# Altium PCB UF_Servo.PcbDoc (part 11 of 12)
Units mm, origin at the board's own origin, x right, y up, seen from the top; angles counter-clockwise.
Board outline 222.63 x 100.1 mm, 6 copper layers (L1, L2, L3, L4, L5, L6), stack 1.609 mm thick; 1138 components, 775 nets, 3720 pads, 1641 vias.
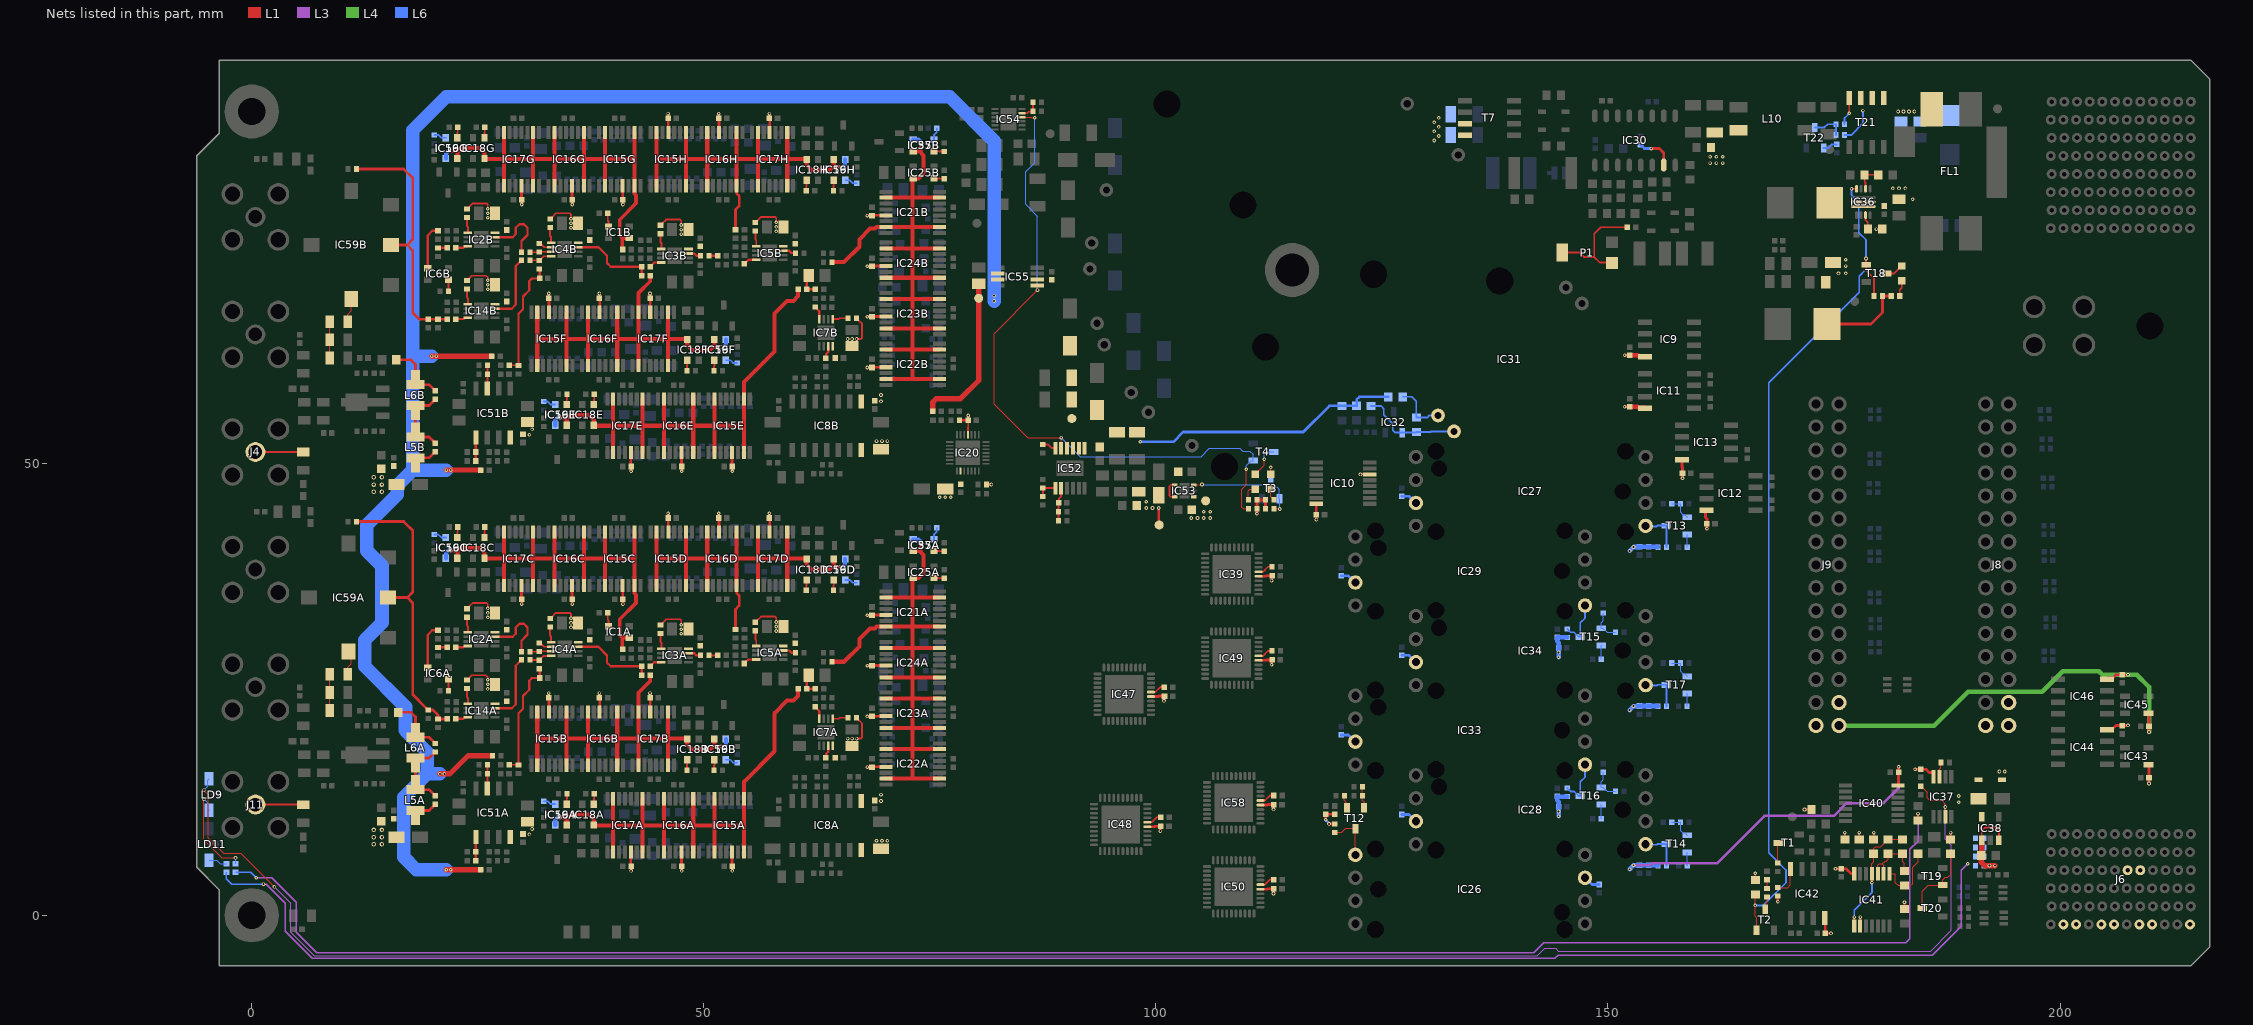
[diagram p12: the nets of this part, all layers, seen from the top]

## Via types
v1: diameter 0.4, hole 0.2, L1 to L6, tented both sides, 1545 vias
v2: diameter 0.4, hole 0.2, L1 to L6, 84 vias
v3: diameter 0.5, hole 0.25, L1 to L6, tented both sides, 12 vias

## Nets (pads, with @x,y where several pads share a name; then routed paths per layer and width w, separated by ;. In a path a pad name is that pad's centre, name@x,y a point inside that pad or via, vN(x,y) a via of type N, cw(c..) or ccw(c..) an arc to the next point about the centre after c; other vN are vias at no path point) (continued)
NetIC1A_1: IC1A.1 R6A.2 | length 1.5
  L1 w0.2: R6A.2@39.37,33.5 39.37,32.73 39.45,32.65 IC1A.1@39.45,32.035
NetIC1A_3: IC1A.3 IC15C.2 IC15C.7 IC15C.10 IC15C.15 IC16C.2 IC16C.7 IC16C.10 IC16C.15 IC17C.2 IC17C.7 IC17C.10 IC17C.15 IC18C.4 IC19C.4 IC56C.4 R7A.2 | length 67.5
  L1 w0.4: R7A.2@41.03,29.5 40.991,29.539 40.991,30.765 ; IC1A.3@41.75,30.765 40.991,30.765 ; IC15C.15@42.325,36.55 42.325,35.675 42.5,35.5 42.5,34.6 40.7,32.8 40.7,31.056 40.991,30.765
  L1 w0.45: v1(22,40.4) 22.57,40.4 22.735,40.235 ; IC19C.4@22.735,39.55 22.735,40.235 ; IC17C.10@27.875,36.55 27.875,39.5 ; IC17C.7@27.875,42.45 27.875,39.5 ; IC17C.15@31.125,36.55 31.125,39.5 ; IC17C.2@31.125,42.45 31.125,39.5 ; IC16C.10@33.475,36.55 33.475,39.5 ; IC16C.7@33.475,42.45 33.475,39.5 ; IC16C.15@36.725,36.55 36.725,39.5 ; IC16C.2@36.725,42.45 36.725,39.5 ; IC15C.10@39.075,36.55 39.075,39.5 ; IC15C.7@39.075,42.45 39.075,39.5 ; IC15C.15@42.325,36.55 42.325,39.5 ; IC15C.2@42.325,42.45 42.325,39.5 ; 22.735,40.235 23.2,40.7 25.2,40.7 25.735,40.165 IC18C.4@25.735,39.55 25.785,39.5 27.875,39.5 ; 27.875,39.5 31.125,39.5 ; 31.125,39.5 33.475,39.5 ; 33.475,39.5 36.725,39.5 ; 36.725,39.5 39.075,39.5 ; 39.075,39.5 42.325,39.5
  L6 w0.45: IC56C.4@21.465,39.55 21.465,40.136 21.729,40.4 v1(22,40.4)
NetIC1B_1: IC1B.1 R6B.2 | length 1.5
  L1 w0.2: R6B.2@39.37,77.7 39.37,76.93 39.45,76.85 IC1B.1@39.45,76.235
NetIC1B_3: IC1B.3 IC15G.2 IC15G.7 IC15G.10 IC15G.15 IC16G.2 IC16G.7 IC16G.10 IC16G.15 IC17G.2 IC17G.7 IC17G.10 IC17G.15 IC18G.4 IC19G.4 IC56G.4 R7B.2 | length 67.5
  L1 w0.4: R7B.2@41.03,73.7 40.991,73.739 40.991,74.965 ; IC1B.3@41.75,74.965 40.991,74.965 ; IC15G.15@42.325,80.75 42.325,79.875 42.5,79.7 42.5,78.8 40.7,77 40.7,75.256 40.991,74.965
  L1 w0.45: v1(22,84.6) 22.57,84.6 22.735,84.435 ; IC19G.4@22.735,83.75 22.735,84.435 ; IC17G.10@27.875,80.75 27.875,83.7 ; IC17G.7@27.875,86.65 27.875,83.7 ; IC17G.15@31.125,80.75 31.125,83.7 ; IC17G.2@31.125,86.65 31.125,83.7 ; IC16G.10@33.475,80.75 33.475,83.7 ; IC16G.7@33.475,86.65 33.475,83.7 ; IC16G.15@36.725,80.75 36.725,83.7 ; IC16G.2@36.725,86.65 36.725,83.7 ; IC15G.10@39.075,80.75 39.075,83.7 ; IC15G.7@39.075,86.65 39.075,83.7 ; IC15G.15@42.325,80.75 42.325,83.7 ; IC15G.2@42.325,86.65 42.325,83.7 ; 22.735,84.435 23.2,84.9 25.2,84.9 25.735,84.365 IC18G.4@25.735,83.75 25.785,83.7 27.875,83.7 ; 27.875,83.7 31.125,83.7 ; 31.125,83.7 33.475,83.7 ; 33.475,83.7 36.725,83.7 ; 36.725,83.7 39.075,83.7 ; 39.075,83.7 42.325,83.7
  L6 w0.45: IC56G.4@21.465,83.75 21.465,84.336 21.729,84.6 v1(22,84.6)
NetIC2A_1: IC2A.1 R14A.1 | length 1.7
  L1 w0.2: R14A.1@23.8,33.03 23.8,32.1 23.9,32 IC2A.1@23.9,31.35
NetIC2A_4: IC2A.4 R11A.2 | length 1.4
  L1 w0.25: R11A.2@22.57,29.7 23.425,29.7 23.575,29.85 IC2A.4@23.9,29.85
NetIC2A_7: IC2A.7 R30A.1 | length 7.8
  L1 w0.25: IC2A.7@26.9,30.85 28.85,30.85 29.2,31.2 29.2,31.9 29.6,32.3 30.1,32.3 30.5,31.9 30.5,31.1 29.83,30.43 R30A.1@29.83,29.2
NetIC2B_1: IC2B.1 R14B.1 | length 1.7
  L1 w0.2: R14B.1@23.8,77.23 23.8,76.3 23.9,76.2 IC2B.1@23.9,75.55
NetIC2B_4: IC2B.4 R11B.2 | length 1.4
  L1 w0.25: R11B.2@22.57,73.9 23.425,73.9 23.575,74.05 IC2B.4@23.9,74.05
NetIC2B_7: IC2B.7 R30B.1 | length 7.8
  L1 w0.25: IC2B.7@26.9,75.05 28.85,75.05 29.2,75.4 29.2,76.1 29.6,76.5 30.1,76.5 30.5,76.1 30.5,75.3 29.83,74.63 R30B.1@29.83,73.4
NetIC3A_1: IC3A.1 R46A.1 | length 1.7
  L1 w0.2: R46A.1@45.2,31.23 45.2,30.3 45.3,30.2 IC3A.1@45.3,29.55
NetIC3A_4: IC3A.4 R39A.2 | length 1.4
  L1 w0.25: R39A.2@44.07,27.6 44.07,27.62 44.5,28.05 IC3A.4@45.3,28.05
NetIC3A_7: IC3A.7 R33A.1 | length 1.4
  L1 w0.25: IC3A.7@48.3,29.05 48.95,29.05 49.2,28.8 R33A.1@49.63,28.8
NetIC3B_1: IC3B.1 R46B.1 | length 1.7
  L1 w0.2: R46B.1@45.2,75.43 45.2,74.5 45.3,74.4 IC3B.1@45.3,73.75
NetIC3B_4: IC3B.4 R39B.2 | length 1.4
  L1 w0.25: R39B.2@44.07,71.8 44.07,71.82 44.5,72.25 IC3B.4@45.3,72.25
NetIC3B_7: IC3B.7 R33B.1 | length 1.4
  L1 w0.25: IC3B.7@48.3,73.25 48.95,73.25 49.2,73 R33B.1@49.63,73
NetIC4A_1: IC4A.1 R49A.1 | length 1.7
  L1 w0.2: R49A.1@33,31.93 33,31 33.1,30.9 IC4A.1@33.1,30.25
NetIC4A_2: IC4A.2 R15A.2 | length 1.5
  L1 w0.2: R15A.2@31.8,30.17 31.99,29.98 32.107,29.98 32.337,29.75 IC4A.2@33.1,29.75
NetIC4A_3: IC4A.3 R15A.1 R30A.2 | length 2.4
  L1 w0.2: R30A.2@30.77,29.2 31.77,29.2 R15A.1@31.8,29.23 31.82,29.25 IC4A.3@33.1,29.25
NetIC4A_4: IC4A.4 R43A.2 R48A.2 | length 2.5
  L1 w0.2: R43A.2@30.77,28.3 31.77,28.3 R48A.2@31.8,28.27 ; R48A.2@31.82,28.27 32.3,28.75 IC4A.4@33.1,28.75
NetIC4A_7: IC4A.7 R39A.1 R56A.2 | length 9.4
  L1 w0.25: IC4A.7@36.1,29.75 38.35,29.75 39.3,28.8 39.3,28 39.7,27.6 R39A.1@43.13,27.6 R56A.2@43.13,26.6
NetIC4B_1: IC4B.1 R49B.1 | length 1.7
  L1 w0.2: R49B.1@33,76.13 33,75.2 33.1,75.1 IC4B.1@33.1,74.45
NetIC4B_2: IC4B.2 R15B.2 | length 1.5
  L1 w0.2: R15B.2@31.8,74.37 31.99,74.18 32.107,74.18 32.337,73.95 IC4B.2@33.1,73.95
NetIC4B_3: IC4B.3 R15B.1 R30B.2 | length 2.4
  L1 w0.2: R30B.2@30.77,73.4 31.77,73.4 R15B.1@31.8,73.43 31.82,73.45 IC4B.3@33.1,73.45
NetIC4B_4: IC4B.4 R43B.2 R48B.2 | length 2.5
  L1 w0.2: R43B.2@30.77,72.5 31.77,72.5 R48B.2@31.8,72.47 ; R48B.2@31.82,72.47 32.3,72.95 IC4B.4@33.1,72.95
NetIC4B_7: IC4B.7 R39B.1 R56B.2 | length 9.4
  L1 w0.25: IC4B.7@36.1,73.95 38.35,73.95 39.3,73 39.3,72.2 39.7,71.8 R39B.1@43.13,71.8 R56B.2@43.13,70.8
NetIC5A_1: IC5A.1 R50A.1 | length 1.7
  L1 w0.2: R50A.1@55.7,31.53 55.7,30.6 55.8,30.5 IC5A.1@55.8,29.85
NetIC5A_4: IC5A.4 R41A.2 | length 1.5
  L1 w0.25: R41A.2@54.47,27.9 54.47,27.92 54.635,28.085 54.655,28.085 54.885,28.315 54.903,28.315 54.938,28.35 IC5A.4@55.8,28.35
NetIC5A_7: IC5A.7 R40A.1 | length 1.4
  L1 w0.25: IC5A.7@58.8,29.35 59.45,29.35 59.7,29.1 R40A.1@60.13,29.1
NetIC5B_1: IC5B.1 R50B.1 | length 1.7
  L1 w0.2: R50B.1@55.7,75.73 55.7,74.8 55.8,74.7 IC5B.1@55.8,74.05
NetIC5B_4: IC5B.4 R41B.2 | length 1.5
  L1 w0.25: R41B.2@54.47,72.1 54.47,72.12 54.635,72.285 54.655,72.285 54.885,72.515 54.903,72.515 54.938,72.55 IC5B.4@55.8,72.55
NetIC5B_7: IC5B.7 R40B.1 | length 1.4
  L1 w0.25: IC5B.7@58.8,73.55 59.45,73.55 59.7,73.3 R40B.1@60.13,73.3
NetIC6A_1: IC6A.1 R32A.2 | length 1.3
  L1 w0.2: IC6A.1@21.75,26.165 21.77,26.145 R32A.2@21.77,24.9
NetIC6A_3: IC6A.3 R24A.1 | length 5
  L1 w0.25: IC6A.3@19.45,27.435 19.45,31.05 19.97,31.57 R24A.1@20.6,31.57
NetIC6B_1: IC6B.1 R32B.2 | length 1.3
  L1 w0.2: IC6B.1@21.75,70.365 21.77,70.345 R32B.2@21.77,69.1
NetIC6B_3: IC6B.3 R24B.1 | length 5
  L1 w0.25: IC6B.3@19.45,71.635 19.45,75.25 19.97,75.77 R24B.1@20.6,75.77
NetIC7A_1: IC7A.1 R54A.1 | length 1.7
  L1 w0.2: IC7A.1@64.25,21.8 64.9,21.8 65,21.9 R54A.1@65.93,21.9
NetIC7A_4: IC7A.4 R44A.2 | length 1.5
  L1 w0.25: R44A.2@62.3,23.13 62.32,23.13 62.485,22.965 62.485,22.945 62.715,22.715 62.715,22.697 62.75,22.662 IC7A.4@62.75,21.8
NetIC7A_7: IC7A.7 R42A.2 | length 1.4
  L1 w0.25: R42A.2@63.5,17.47 63.5,17.9 63.75,18.15 IC7A.7@63.75,18.8
NetIC7B_1: IC7B.1 R54B.1 | length 1.7
  L1 w0.2: IC7B.1@64.25,66 64.9,66 65,66.1 R54B.1@65.93,66.1
NetIC7B_4: IC7B.4 R44B.2 | length 1.5
  L1 w0.25: R44B.2@62.3,67.33 62.32,67.33 62.485,67.165 62.485,67.145 62.715,66.915 62.715,66.897 62.75,66.862 IC7B.4@62.75,66
NetIC7B_7: IC7B.7 R42B.2 | length 1.4
  L1 w0.25: R42B.2@63.5,61.67 63.5,62.1 63.75,62.35 IC7B.7@63.75,63
NetIC14A_1: IC14A.1 R59A.1 | length 1.7
  L1 w0.2: R59A.1@23.8,25.13 23.8,24.2 23.9,24.1 IC14A.1@23.9,23.45
NetIC14A_4: IC14A.4 R57A.2 | length 1.4
  L1 w0.25: R57A.2@22.57,21.8 23.425,21.8 23.575,21.95 IC14A.4@23.9,21.95
NetIC14A_7: IC14A.7 R43A.1 | length 7.7
  L1 w0.25: IC14A.7@26.9,22.95 28.75,22.95 29.2,23.4 29.2,27.67 29.62,28.09 29.64,28.09 29.83,28.28 R43A.1@29.83,28.3
NetIC14B_1: IC14B.1 R59B.1 | length 1.7
  L1 w0.2: R59B.1@23.8,69.33 23.8,68.4 23.9,68.3 IC14B.1@23.9,67.65
NetIC14B_4: IC14B.4 R57B.2 | length 1.4
  L1 w0.25: R57B.2@22.57,66 23.425,66 23.575,66.15 IC14B.4@23.9,66.15
NetIC14B_7: IC14B.7 R43B.1 | length 7.7
  L1 w0.25: IC14B.7@26.9,67.15 28.75,67.15 29.2,67.6 29.2,71.87 29.62,72.29 29.64,72.29 29.83,72.48 R43B.1@29.83,72.5
NetIC15A_2: IC15A.2 IC15A.7 IC15A.10 IC15A.15 IC16A.2 IC16A.7 IC16A.10 IC16A.15 IC17A.2 IC17A.7 IC17A.10 IC17A.15 IC18A.4 IC19A.4 IC56A.4 R31A.1 | length 73.8
  L1 w0.45: v1(34.1,10.9) 34.67,10.9 34.835,10.735 ; IC19A.4@34.835,10.05 34.835,10.735 ; IC17A.10@39.975,7.05 39.975,10 ; IC17A.7@39.975,12.95 39.975,10 ; IC17A.15@43.225,7.05 43.225,10 ; IC17A.2@43.225,12.95 43.225,10 ; IC16A.10@45.575,7.05 45.575,10 ; IC16A.7@45.575,12.95 45.575,10 ; IC16A.15@48.825,7.05 48.825,10 ; IC16A.2@48.825,12.95 48.825,10 ; IC15A.10@51.175,7.05 51.175,10 ; IC15A.7@51.175,12.95 51.175,10 ; IC15A.15@54.425,7.05 54.425,10 ; R31A.1@60.43,25.1 60.43,24.33 59.9,23.8 59.2,23.8 57.8,22.4 57.8,18.2 54.425,14.825 IC15A.2@54.425,12.95 54.425,10 ; 34.835,10.735 35.3,11.2 37.3,11.2 37.835,10.665 IC18A.4@37.835,10.05 37.885,10 39.975,10 ; 39.975,10 43.225,10 ; 43.225,10 45.575,10 ; 45.575,10 48.825,10 ; 48.825,10 51.175,10 ; 51.175,10 54.425,10
  L6 w0.45: IC56A.4@33.565,10.05 33.565,10.636 33.829,10.9 v1(34.1,10.9)
NetIC15B_2: IC15B.2 IC15B.7 IC15B.10 IC15B.15 IC16B.2 IC16B.7 IC16B.10 IC16B.15 IC17B.2 IC17B.7 IC17B.10 IC17B.15 IC18B.4 IC19B.4 IC56B.4 R56A.1 | length 63.3
  L1 w0.4: IC17B.15@42.775,22.55 42.775,24.675 44.07,25.97 R56A.1@44.07,26.6
  L1 w0.45: IC15B.2@31.575,16.65 31.575,19.6 ; IC15B.15@31.575,22.55 31.575,19.6 ; IC15B.7@34.825,16.65 34.825,19.6 ; IC15B.10@34.825,22.55 34.825,19.6 ; IC16B.2@37.175,16.65 37.175,19.6 ; IC16B.15@37.175,22.55 37.175,19.6 ; IC16B.7@40.425,16.65 40.425,19.6 ; IC16B.10@40.425,22.55 40.425,19.6 ; IC17B.2@42.775,16.65 42.775,19.6 ; IC17B.15@42.775,22.55 42.775,19.6 ; IC17B.7@46.025,16.65 46.025,19.6 ; IC17B.10@46.025,22.55 46.025,19.6 ; IC19B.4@51.165,19.55 51.165,18.865 ; v1(51.9,18.7) 51.33,18.7 51.165,18.865 ; 31.575,19.6 34.825,19.6 ; 34.825,19.6 37.175,19.6 ; 37.175,19.6 40.425,19.6 ; 40.425,19.6 42.775,19.6 ; 42.775,19.6 46.025,19.6 ; 46.025,19.6 48.115,19.6 IC18B.4@48.165,19.55 48.165,18.935 48.7,18.4 50.7,18.4 51.165,18.865
  L6 w0.45: v1(51.9,18.7) 52.171,18.7 52.435,18.964 IC56B.4@52.435,19.55
NetIC15D_2: IC15D.2 IC15D.7 IC15D.10 IC15D.15 IC16D.2 IC16D.7 IC16D.10 IC16D.15 IC17D.2 IC17D.7 IC17D.10 IC17D.15 IC18D.4 IC19D.4 IC56D.4 R8A.2 | length 63.9
  L1 w0.3: R8A.2@53.5,31.67 53.5,33.9 53.9,34.3 53.9,35.4 53.85,35.45 53.85,35.486 53.625,35.711 IC16D.7@53.625,36.55
  L1 w0.45: IC15D.2@44.775,36.55 44.775,39.5 ; IC15D.15@44.775,42.45 44.775,39.5 ; IC15D.7@48.025,36.55 48.025,39.5 ; IC15D.10@48.025,42.45 48.025,39.5 ; IC16D.2@50.375,36.55 50.375,39.5 ; IC16D.15@50.375,42.45 50.375,39.5 ; IC16D.7@53.625,36.55 53.625,39.5 ; IC16D.10@53.625,42.45 53.625,39.5 ; IC17D.2@55.975,36.55 55.975,39.5 ; IC17D.15@55.975,42.45 55.975,39.5 ; IC17D.7@59.225,36.55 59.225,39.5 ; IC17D.10@59.225,42.45 59.225,39.5 ; IC19D.4@64.365,39.45 64.365,38.765 ; v1(65.1,38.6) 64.53,38.6 64.365,38.765 ; 44.775,39.5 48.025,39.5 ; 48.025,39.5 50.375,39.5 ; 50.375,39.5 53.625,39.5 ; 53.625,39.5 55.975,39.5 ; 55.975,39.5 59.225,39.5 ; 59.225,39.5 61.315,39.5 IC18D.4@61.365,39.45 61.365,38.835 61.9,38.3 63.9,38.3 64.365,38.765
  L6 w0.45: v1(65.1,38.6) 65.371,38.6 65.635,38.864 IC56D.4@65.635,39.45
NetIC15E_2: IC15E.2 IC15E.7 IC15E.10 IC15E.15 IC16E.2 IC16E.7 IC16E.10 IC16E.15 IC17E.2 IC17E.7 IC17E.10 IC17E.15 IC18E.4 IC19E.4 IC56E.4 R31B.1 | length 73.8
  L1 w0.45: v1(34.1,55.1) 34.67,55.1 34.835,54.935 ; IC19E.4@34.835,54.25 34.835,54.935 ; IC17E.10@39.975,51.25 39.975,54.2 ; IC17E.7@39.975,57.15 39.975,54.2 ; IC17E.15@43.225,51.25 43.225,54.2 ; IC17E.2@43.225,57.15 43.225,54.2 ; IC16E.10@45.575,51.25 45.575,54.2 ; IC16E.7@45.575,57.15 45.575,54.2 ; IC16E.15@48.825,51.25 48.825,54.2 ; IC16E.2@48.825,57.15 48.825,54.2 ; IC15E.10@51.175,51.25 51.175,54.2 ; IC15E.7@51.175,57.15 51.175,54.2 ; IC15E.15@54.425,51.25 54.425,54.2 ; R31B.1@60.43,69.3 60.43,68.53 59.9,68 59.2,68 57.8,66.6 57.8,62.4 54.425,59.025 IC15E.2@54.425,57.15 54.425,54.2 ; 34.835,54.935 35.3,55.4 37.3,55.4 37.835,54.865 IC18E.4@37.835,54.25 37.885,54.2 39.975,54.2 ; 39.975,54.2 43.225,54.2 ; 43.225,54.2 45.575,54.2 ; 45.575,54.2 48.825,54.2 ; 48.825,54.2 51.175,54.2 ; 51.175,54.2 54.425,54.2
  L6 w0.45: IC56E.4@33.565,54.25 33.565,54.836 33.829,55.1 v1(34.1,55.1)
NetIC15F_2: IC15F.2 IC15F.7 IC15F.10 IC15F.15 IC16F.2 IC16F.7 IC16F.10 IC16F.15 IC17F.2 IC17F.7 IC17F.10 IC17F.15 IC18F.4 IC19F.4 IC56F.4 R56B.1 | length 63.3
  L1 w0.4: IC17F.15@42.775,66.75 42.775,68.875 44.07,70.17 R56B.1@44.07,70.8
  L1 w0.45: IC15F.2@31.575,60.85 31.575,63.8 ; IC15F.15@31.575,66.75 31.575,63.8 ; IC15F.7@34.825,60.85 34.825,63.8 ; IC15F.10@34.825,66.75 34.825,63.8 ; IC16F.2@37.175,60.85 37.175,63.8 ; IC16F.15@37.175,66.75 37.175,63.8 ; IC16F.7@40.425,60.85 40.425,63.8 ; IC16F.10@40.425,66.75 40.425,63.8 ; IC17F.2@42.775,60.85 42.775,63.8 ; IC17F.15@42.775,66.75 42.775,63.8 ; IC17F.7@46.025,60.85 46.025,63.8 ; IC17F.10@46.025,66.75 46.025,63.8 ; IC19F.4@51.165,63.75 51.165,63.065 ; v1(51.9,62.9) 51.33,62.9 51.165,63.065 ; 31.575,63.8 34.825,63.8 ; 34.825,63.8 37.175,63.8 ; 37.175,63.8 40.425,63.8 ; 40.425,63.8 42.775,63.8 ; 42.775,63.8 46.025,63.8 ; 46.025,63.8 48.115,63.8 IC18F.4@48.165,63.75 48.165,63.135 48.7,62.6 50.7,62.6 51.165,63.065
  L6 w0.45: v1(51.9,62.9) 52.171,62.9 52.435,63.164 IC56F.4@52.435,63.75
NetIC15H_2: IC15H.2 IC15H.7 IC15H.10 IC15H.15 IC16H.2 IC16H.7 IC16H.10 IC16H.15 IC17H.2 IC17H.7 IC17H.10 IC17H.15 IC18H.4 IC19H.4 IC56H.4 R8B.2 | length 63.9
  L1 w0.3: R8B.2@53.5,75.87 53.5,78.1 53.9,78.5 53.9,79.6 53.85,79.65 53.85,79.686 53.625,79.911 IC16H.7@53.625,80.75
  L1 w0.45: IC15H.2@44.775,80.75 44.775,83.7 ; IC15H.15@44.775,86.65 44.775,83.7 ; IC15H.7@48.025,80.75 48.025,83.7 ; IC15H.10@48.025,86.65 48.025,83.7 ; IC16H.2@50.375,80.75 50.375,83.7 ; IC16H.15@50.375,86.65 50.375,83.7 ; IC16H.7@53.625,80.75 53.625,83.7 ; IC16H.10@53.625,86.65 53.625,83.7 ; IC17H.2@55.975,80.75 55.975,83.7 ; IC17H.15@55.975,86.65 55.975,83.7 ; IC17H.7@59.225,80.75 59.225,83.7 ; IC17H.10@59.225,86.65 59.225,83.7 ; IC19H.4@64.365,83.65 64.365,82.965 ; v1(65.1,82.8) 64.53,82.8 64.365,82.965 ; 44.775,83.7 48.025,83.7 ; 48.025,83.7 50.375,83.7 ; 50.375,83.7 53.625,83.7 ; 53.625,83.7 55.975,83.7 ; 55.975,83.7 59.225,83.7 ; 59.225,83.7 61.315,83.7 IC18H.4@61.365,83.65 61.365,83.035 61.9,82.5 63.9,82.5 64.365,82.965
  L6 w0.45: v1(65.1,82.8) 65.371,82.8 65.635,83.064 IC56H.4@65.635,83.65
NetIC18A_1: IC18A.1 R60A.2 | length 1.2
  L1 w0.2: IC18A.1@37.835,12.35 37.835,12.935 37.87,12.97 R60A.2@37.87,13.5
NetIC18B_1: IC18B.1 R60B.2 | length 1.2
  L1 w0.2: R60B.2@48.13,16.1 48.13,16.63 48.165,16.665 IC18B.1@48.165,17.25
NetIC18C_1: IC18C.1 R60C.2 | length 1.2
  L1 w0.2: IC18C.1@25.735,41.85 25.735,42.435 25.77,42.47 R60C.2@25.77,43
NetIC18D_1: IC18D.1 R60D.2 | length 1.2
  L1 w0.2: R60D.2@61.33,36 61.33,36.53 61.365,36.565 IC18D.1@61.365,37.15
NetIC18E_1: IC18E.1 R60E.2 | length 1.2
  L1 w0.2: IC18E.1@37.835,56.55 37.835,57.135 37.87,57.17 R60E.2@37.87,57.7
NetIC18F_1: IC18F.1 R60F.2 | length 1.2
  L1 w0.2: R60F.2@48.13,60.3 48.13,60.83 48.165,60.865 IC18F.1@48.165,61.45
NetIC18G_1: IC18G.1 R60G.2 | length 1.2
  L1 w0.2: IC18G.1@25.735,86.05 25.735,86.635 25.77,86.67 R60G.2@25.77,87.2
NetIC18H_1: IC18H.1 R60H.2 | length 1.2
  L1 w0.2: R60H.2@61.33,80.2 61.33,80.73 61.365,80.765 IC18H.1@61.365,81.35
NetIC19A_1: IC19A.1 R61A.2 | length 1.2
  L1 w0.2: IC19A.1@34.835,12.35 34.835,12.935 34.87,12.97 R61A.2@34.87,13.5
NetIC19B_1: IC19B.1 R61B.2 | length 1.2
  L1 w0.2: R61B.2@51.13,16.1 51.13,16.63 51.165,16.665 IC19B.1@51.165,17.25
NetIC19C_1: IC19C.1 R61C.2 | length 1.2
  L1 w0.2: IC19C.1@22.735,41.85 22.735,42.435 22.77,42.47 R61C.2@22.77,43
NetIC19D_1: IC19D.1 R61D.2 | length 1.2
  L1 w0.2: R61D.2@64.33,36 64.33,36.53 64.365,36.565 IC19D.1@64.365,37.15
NetIC19E_1: IC19E.1 R61E.2 | length 1.2
  L1 w0.2: IC19E.1@34.835,56.55 34.835,57.135 34.87,57.17 R61E.2@34.87,57.7
NetIC19F_1: IC19F.1 R61F.2 | length 1.2
  L1 w0.2: R61F.2@51.13,60.3 51.13,60.83 51.165,60.865 IC19F.1@51.165,61.45
NetIC19G_1: IC19G.1 R61G.2 | length 1.2
  L1 w0.2: IC19G.1@22.735,86.05 22.735,86.635 22.77,86.67 R61G.2@22.77,87.2
NetIC19H_1: IC19H.1 R61H.2 | length 1.2
  L1 w0.2: R61H.2@64.33,80.2 64.33,80.73 64.365,80.765 IC19H.1@64.365,81.35
NetIC21A_2: IC21A.2 IC21A.7 IC21A.10 IC21A.15 IC22A.2 IC22A.7 IC22A.10 IC22A.15 IC23A.2 IC23A.7 IC23A.10 IC23A.15 IC24A.2 IC24A.7 IC24A.10 IC24A.15 IC25A.4 IC35A.4 IC57A.4 R10A.1 | length 84.2
  L1 w0.45: R10A.1@64.17,28.1 65.5,28.1 67.2,29.8 67.2,30.6 68.4,31.8 68.942,31.8 69.117,31.975 73.1,31.975 ; IC22A.15@70.15,15.175 73.1,15.175 ; IC22A.10@70.15,18.425 73.1,18.425 ; IC23A.15@70.15,20.775 73.1,20.775 ; IC23A.10@70.15,24.025 73.1,24.025 ; IC24A.15@70.15,26.375 73.1,26.375 ; IC24A.10@70.15,29.625 73.1,29.625 ; IC21A.10@70.15,35.225 73.1,35.225 ; IC35A.4@73.15,40.365 73.835,40.365 ; v1(74,41.1) 74,40.53 73.835,40.365 ; IC22A.2@76.05,15.175 73.1,15.175 ; IC22A.7@76.05,18.425 73.1,18.425 ; IC23A.2@76.05,20.775 73.1,20.775 ; IC23A.7@76.05,24.025 73.1,24.025 ; IC24A.2@76.05,26.375 73.1,26.375 ; IC24A.7@76.05,29.625 73.1,29.625 ; IC21A.2@76.05,31.975 73.1,31.975 ; IC21A.7@76.05,35.225 73.1,35.225 ; 73.1,15.175 73.1,18.425 ; 73.1,18.425 73.1,20.775 ; 73.1,20.775 73.1,24.025 ; 73.1,24.025 73.1,26.375 ; 73.1,26.375 73.1,29.625 ; 73.1,29.625 73.1,31.975 ; 73.1,31.975 73.1,35.225 ; 73.1,35.225 73.1,37.315 IC25A.4@73.15,37.365 73.765,37.365 74.3,37.9 74.3,39.9 73.835,40.365
  L6 w0.45: IC57A.4@73.15,41.635 73.736,41.635 74,41.371 v1(74,41.1)
NetIC21B_2: IC21B.2 IC21B.7 IC21B.10 IC21B.15 IC22B.2 IC22B.7 IC22B.10 IC22B.15 IC23B.2 IC23B.7 IC23B.10 IC23B.15 IC24B.2 IC24B.7 IC24B.10 IC24B.15 IC25B.4 IC35B.4 IC57B.4 R10B.1 | length 84.2
  L1 w0.45: R10B.1@64.17,72.3 65.5,72.3 67.2,74 67.2,74.8 68.4,76 68.942,76 69.117,76.175 73.1,76.175 ; IC22B.15@70.15,59.375 73.1,59.375 ; IC22B.10@70.15,62.625 73.1,62.625 ; IC23B.15@70.15,64.975 73.1,64.975 ; IC23B.10@70.15,68.225 73.1,68.225 ; IC24B.15@70.15,70.575 73.1,70.575 ; IC24B.10@70.15,73.825 73.1,73.825 ; IC21B.10@70.15,79.425 73.1,79.425 ; IC35B.4@73.15,84.565 73.835,84.565 ; v1(74,85.3) 74,84.73 73.835,84.565 ; IC22B.2@76.05,59.375 73.1,59.375 ; IC22B.7@76.05,62.625 73.1,62.625 ; IC23B.2@76.05,64.975 73.1,64.975 ; IC23B.7@76.05,68.225 73.1,68.225 ; IC24B.2@76.05,70.575 73.1,70.575 ; IC24B.7@76.05,73.825 73.1,73.825 ; IC21B.2@76.05,76.175 73.1,76.175 ; IC21B.7@76.05,79.425 73.1,79.425 ; 73.1,59.375 73.1,62.625 ; 73.1,62.625 73.1,64.975 ; 73.1,64.975 73.1,68.225 ; 73.1,68.225 73.1,70.575 ; 73.1,70.575 73.1,73.825 ; 73.1,73.825 73.1,76.175 ; 73.1,76.175 73.1,79.425 ; 73.1,79.425 73.1,81.515 IC25B.4@73.15,81.565 73.765,81.565 74.3,82.1 74.3,84.1 73.835,84.565
  L6 w0.45: IC57B.4@73.15,85.835 73.736,85.835 74,85.571 v1(74,85.3)
NetIC25A_1: IC25A.1 R63A.2 | length 1.2
  L1 w0.2: IC25A.1@75.45,37.365 76.035,37.365 76.07,37.33 R63A.2@76.6,37.33
NetIC25B_1: IC25B.1 R63B.2 | length 1.2
  L1 w0.2: IC25B.1@75.45,81.565 76.035,81.565 76.07,81.53 R63B.2@76.6,81.53
NetIC26_1: IC26.1 R79.1 T12.3 | length 5.4
  L1 w0.125: R79.1@119.776,9.224 120.562,9.224 120.994,9.656 122.064,9.656 T12.3@122.076,9.644 122.062,9.63 IC26.1@122.062,6.741
NetIC27_1: IC27.1 R80.1 T13.3 | length 4.8
  L6 w0.2: IC27.1@154.162,43.121 154.227,43.056 155.394,43.056 155.494,43.156 156.444,43.156 T13.3@156.464,43.136 R80.1@156.464,40.756
NetIC28_1: IC28.1 R87.1 T14.3 | length 4.8
  L6 w0.2: IC28.1@154.162,7.921 154.227,7.856 155.394,7.856 155.494,7.956 T14.3@156.444,7.956 156.464,7.936 R87.1@156.464,5.556
NetIC29_1: IC29.1 R88.1 T15.3 | length 5.5
  L6 w0.2: R88.1@145.494,31.726 145.514,31.726 145.741,31.498 145.741,31.478 145.864,31.356 146.244,31.356 146.744,30.856 T15.3@146.944,30.856 146.944,32.406 147.462,32.924 IC29.1@147.462,34.321
NetIC30_7: IC30.7 R102.2 | length 4.3
  L1 w0.3: v1(154.794,84.856) 155.694,84.856 156.169,84.381 IC30.7@156.169,83.031
  L6 w0.3: R102.2@153.594,85.286 153.614,85.286 153.754,85.146 153.754,85.126 154.024,84.856 v1(154.794,84.856)
NetIC31_1: IC31.1 R114.1 R115.2 | length 6
  L6 w0.2: R114.1@127.3,57.4 128.3,57.4 128.8,56.9 R115.2@128.8,55.1 130,55.1 130.244,55.344 IC31.1@131.207,55.344
NetIC31_2: IC31.2 IC32.1 R115.1 R117.2 | length 11.3
  L6 w0.2: R117.2@123.8,56.4 124.9,56.4 125.2,56.1 125.2,55.4 126.2,54.4 126.2,53.7 126.45,53.45 IC32.1@127.25,53.45 128.75,53.45 R115.1@128.8,53.5 130.4,53.5 130.476,53.576 IC31.2@132.974,53.576
NetIC33_1: IC33.1 R95.1 T16.3 | length 5.5
  L6 w0.2: R95.1@145.494,14.126 145.514,14.126 145.741,13.898 145.741,13.878 145.864,13.756 146.244,13.756 146.744,13.256 T16.3@146.944,13.256 146.944,14.806 147.462,15.324 IC33.1@147.462,16.721
NetIC34_1: IC34.1 R96.1 T17.3 | length 4.8
  L6 w0.2: IC34.1@154.162,25.521 154.227,25.456 155.394,25.456 155.494,25.556 156.444,25.556 T17.3@156.464,25.536 R96.1@156.464,23.156
NetIC35A_1: IC35A.1 R64A.2 | length 1.2
  L1 w0.2: IC35A.1@75.45,40.365 76.035,40.365 76.07,40.33 R64A.2@76.6,40.33
NetIC35B_1: IC35B.1 R64B.2 | length 1.2
  L1 w0.2: IC35B.1@75.45,84.565 76.035,84.565 76.07,84.53 R64B.2@76.6,84.53
NetIC36_2: IC36.2 L1.1
NetIC36_5: IC36.5 R127.1 R129.2 | length 3.1
  L1 w0.2: IC36.5@178.494,80.406 178.494,81.056 178.394,81.156 R127.1@178.394,81.956 R129.2@179.894,81.956
NetIC36_10: IC36.10 R128.2 | length 1.7
  L1 w0.2: IC36.10@178.494,77.506 178.494,76.956 178.744,76.706 R128.2@178.744,75.956
NetIC37_3: IC37.3 LD9.1 R135.1 | length 227.7
  L1 w0.1: v1(-5.3,13.9) -4.8,13.4 -4.8,8.6 -3.1,6.9 -1.2,6.9 v1(2.5,3.2)
  L1 w0.125: R135.1@184.594,14.326 184.821,14.098 184.851,14.098 185.294,13.656 185.294,13.056 185.594,12.756 186.894,12.756 187.319,12.331 v1(187.319,12.031) IC37.3@187.319,10.956
  L3 w0.1: v1(2.5,3.2) 4.3,1.4 4.3,-1.8 6.9,-4.4 142.2,-4.4 143,-3.6 144.2,-3.6 144.5,-3.9 185.694,-3.9 187.994,-1.6 187.994,7.796 187.319,8.471 v1(187.319,12.031)
  L6 w0.1: v1(-5.3,13.9) -4.88,14.32 -4.88,15.002 LD9.1@-4.721,15.161
NetIC37_7: IC37.7 R137.2 | length 1.7
  L1 w0.125: IC37.7@186.669,15.356 186.669,16.231 186.824,16.386 R137.2@186.824,16.956
NetIC39_36: IC39.36 R122.2 | length 1.7
  L1 w0.2: IC39.36@111.35,38.05 111.85,38.05 112.4,38.6 R122.2@112.83,38.6
NetIC41_1: IC41.1 IC41.11 R37.1 R160.1 R166.1 | length 13.1
  L1 w0.125: IC41.11@179.194,4.656 179.194,5.756 179.394,5.956 R160.1@179.394,6.856 179.394,7.456 179.594,7.656 180.194,7.656 180.556,8.018 180.556,8.068 180.944,8.456 R166.1@180.994,8.456 R37.1@182.594,8.456
  L1 w0.2: IC41.1@177.244,-1.144 v1(177.244,-0.144) ; v1(179.194,3.656) IC41.11@179.194,4.656
  L6 w0.2: v1(177.244,-0.144) 177.244,0.606 179.194,2.556 v1(179.194,3.656)
NetIC41_8: IC41.8 R179.1 R183.1 | length 7.2
  L1 w0.125: IC41.8@181.144,4.656 181.694,4.656 181.794,4.556 181.794,3.656 182.094,3.356 R179.1@182.794,3.356 183.494,3.356 183.694,3.556 183.694,5.356 184.294,5.956 R183.1@184.294,6.856
NetIC41_9: IC41.9 IC41.10 R37.2 R166.2 R179.2 | length 7.7
  L1 w0.125: IC41.10@179.844,4.656 179.844,5.606 179.994,5.756 180.344,5.756 ; IC41.9@180.494,4.656 180.494,5.606 180.344,5.756 ; R179.2@182.794,4.956 182.794,5.756 182.594,5.956 R37.2@182.594,6.856 R166.2@180.994,6.856 180.994,6.256 180.794,6.056 180.644,6.056 180.344,5.756
NetIC42_4: IC42.4 R181.2 | length 3.2
  L1 w0.125: R181.2@168.794,3.126 169.864,3.126 170.189,3.451 IC42.4@170.189,5.156
NetIC47_36: IC47.36 R125.2 | length 1.7
  L1 w0.2: IC47.36@99.45,24.75 99.95,24.75 100.5,25.3 R125.2@100.93,25.3
NetIC48_36: IC48.36 R123.2 | length 1.7
  L1 w0.2: IC48.36@99.05,10.35 99.55,10.35 100.1,10.9 R123.2@100.53,10.9
NetIC49_36: IC49.36 R124.2 | length 1.7
  L1 w0.2: IC49.36@111.35,28.75 111.85,28.75 112.4,29.3 R124.2@112.83,29.3
NetIC50_36: IC50.36 R116.2 | length 1.7
  L1 w0.2: IC50.36@111.55,3.45 112.05,3.45 112.6,4 R116.2@113.03,4
NetIC51A_3: IC51A.3 R73A.2 R74A.2 | length 2.6
  L1 w0.25: IC51A.3@26.065,14.1 26.065,16.695 R73A.2@26.07,16.7
NetIC51A_5: IC51A.5 R68A.2 R69A.2 | length 2.6
  L1 w0.25: R68A.2@24.77,6.1 24.77,8.675 IC51A.5@24.795,8.7
NetIC51B_3: IC51B.3 R73B.2 R74B.2 | length 2.6
  L1 w0.25: IC51B.3@26.065,58.3 26.065,60.895 R73B.2@26.07,60.9
NetIC51B_5: IC51B.5 R68B.2 R69B.2 | length 2.6
  L1 w0.25: R68B.2@24.77,50.3 24.77,52.875 IC51B.5@24.795,52.9
NetIC54_5: IC54.5 R202.1 R203.1 | length 2.3
  L1 w0.2: IC54.5@85.2,88.775 85.775,88.775 85.937,88.937 86.347,88.937 R203.1@86.41,89 R202.1@86.41,90
NetIC56A_1: IC56A.1 R207A.2 | length 1.4
  L6 w0.2: R207A.2@32.3,12.67 32.73,12.67 33.05,12.35 IC56A.1@33.565,12.35
NetIC56B_1: IC56B.1 R207B.2 | length 1.4
  L6 w0.2: IC56B.1@52.435,17.25 52.95,17.25 53.27,16.93 R207B.2@53.7,16.93
NetIC56C_1: IC56C.1 R207C.2 | length 1.4
  L6 w0.2: R207C.2@20.2,42.17 20.63,42.17 20.95,41.85 IC56C.1@21.465,41.85
NetIC56D_1: IC56D.1 R207D.2 | length 1.4
  L6 w0.2: IC56D.1@65.635,37.15 66.15,37.15 66.47,36.83 R207D.2@66.9,36.83
NetIC56E_1: IC56E.1 R207E.2 | length 1.4
  L6 w0.2: R207E.2@32.3,56.87 32.73,56.87 33.05,56.55 IC56E.1@33.565,56.55
NetIC56F_1: IC56F.1 R207F.2 | length 1.4
  L6 w0.2: IC56F.1@52.435,61.45 52.95,61.45 53.27,61.13 R207F.2@53.7,61.13
NetIC56G_1: IC56G.1 R207G.2 | length 1.4
  L6 w0.2: R207G.2@20.2,86.37 20.63,86.37 20.95,86.05 IC56G.1@21.465,86.05
NetIC56H_1: IC56H.1 R207H.2 | length 1.4
  L6 w0.2: IC56H.1@65.635,81.35 66.15,81.35 66.47,81.03 R207H.2@66.9,81.03
NetIC57A_1: IC57A.1 R209A.2 | length 1.4
  L6 w0.2: IC57A.1@75.45,41.635 75.45,42.15 75.77,42.47 R209A.2@75.77,42.9
NetIC57B_1: IC57B.1 R209B.2 | length 1.4
  L6 w0.2: IC57B.1@75.45,85.835 75.45,86.35 75.77,86.67 R209B.2@75.77,87.1
NetIC58_36: IC58.36 R211.2 | length 1.7
  L1 w0.2: IC58.36@111.55,12.75 112.05,12.75 112.6,13.3 R211.2@113.03,13.3
NetIC59A_2: IC59A.2 R219A.2 | length 2.7
  L1 w0.132: R219A.2@10.6,26.7 10.6,27.5 11,27.9 IC59A.2@11,29.23
NetIC59B_2: IC59B.2 R219B.2 | length 2.7
  L1 w0.132: R219B.2@10.6,65.7 10.6,66.5 11,66.9 IC59B.2@11,68.23
NetL2A_1: L2A.1 R18A.1 R31A.2 | length 2.6
  L1 w0.25: L2A.1@61.6,26.6 61.37,26.37 R31A.2@61.37,25.1 R18A.1@62.33,25.1
NetL2B_1: L2B.1 R18B.1 R31B.2 | length 2.6
  L1 w0.25: L2B.1@61.6,70.8 61.37,70.57 R31B.2@61.37,69.3 R18B.1@62.33,69.3
NetL5A_1: L5A.1 L6A.2 R214A.1 R215A.2 | length 6.5
  L1 w0.3: L5A.1@18.1,13.95 19.62,13.95 20.14,13.43 20.14,13.41 20.28,13.27 R214A.1@20.3,13.27 ; L5A.1@18.1,14.95 L6A.2@18.1,16.45 ; L6A.2@18.1,17.45 19.62,17.45 20.14,17.97 20.14,17.99 20.28,18.13 R215A.2@20.3,18.13
NetL5B_1: L5B.1 L6B.2 R214B.1 R215B.2 | length 6.5
  L1 w0.3: L5B.1@18.1,52.95 19.62,52.95 20.14,52.43 20.14,52.41 20.28,52.27 R214B.1@20.3,52.27 ; L5B.1@18.1,53.95 L6B.2@18.1,55.45 ; L6B.2@18.1,56.45 19.62,56.45 20.14,56.97 20.14,56.99 20.28,57.13 R215B.2@20.3,57.13
NetL6A_1: L6A.1 L7A.2 R215A.1 | length 6.1
  L1 w0.3: L7A.2@16,22.5 17.6,22.5 18.1,22 L6A.1@18.1,20.75 ; L6A.1@18.1,19.75 19.62,19.75 20.14,19.23 20.14,19.21 20.28,19.07 R215A.1@20.3,19.07
NetL6B_1: L6B.1 L7B.2 R215B.1 | length 6.1
  L1 w0.3: L7B.2@16,61.5 17.6,61.5 18.1,61 L6B.1@18.1,59.75 ; L6B.1@18.1,58.75 19.62,58.75 20.14,58.23 20.14,58.21 20.28,58.07 R215B.1@20.3,58.07
NetLD1_1: LD1.1 T3.3 | length 1.9
  L1 w0.1: LD1.1@112.7,48.825 v1(112.7,49.6)
  L6 w0.1: T3.3@112.7,48.45 v1(112.7,49.6)
NetLD1_2: LD1.2 R142.1 | length 1.3
  L1 w0.1: LD1.2@112.7,47.175 112.7,46.37 112.81,46.26 112.83,46.26 113.07,46.02 R142.1@113.07,46
NetLD2_1: LD2.1 T4.3 | length 3.8
  L1 w0.1: LD2.1@111,48.825 112,49.825 v1(112,50.5)
  L6 w0.1: v1(112,50.5) 112,51.1 112.2,51.3 T4.3@113.05,51.3
NetLD2_2: LD2.2 R194.1 | length 1.9
  L1 w0.1: R194.1@110.23,46 110.23,47.03 110.375,47.175 LD2.2@111,47.175
NetLD9_2: LD9.2 R132.1 | length 11
  L1 w0.1: v1(-5.3,12.922) -5.3,8.4 -3.3,6.4 v1(-1.8,6.4)
  L6 w0.1: v1(-5.3,12.922) -4.88,12.502 -4.88,11.82 LD9.2@-4.721,11.661 ; R132.1@-1.8,5.77 v1(-1.8,6.4)
NetLD10_1: LD10.1 T18.3 | length 2
  L1 w0.2: T18.3@180.844,71.056 181.669,71.056 LD10.1@182.494,71.881
NetLD10_2: LD10.2 R139.1 | length 1.8
  L1 w0.2: R139.1@182.264,68.556 182.264,69.226 182.494,69.456 LD10.2@182.494,70.231
NetLD11_2: LD11.2 R141.1 | length 2.1
  L6 w0.1: LD11.2@-4.721,6.149 -3.85,6.149 -3.471,5.77 R141.1@-2.8,5.77
NetP1_2: P1.2 P1.3 R108.1 | length 12.5
  L1 w0.2: P1.2@144.944,73.356 146.894,73.356 147.394,72.856 148.494,72.856 ; P1.3@150.444,72.206 150.394,72.256 149.094,72.256 148.494,72.856 ; R108.1@152.124,76.156 149.194,76.156 148.494,75.456 148.494,72.856
NetR11A_1: R11A.1 R12A.2 | length 1
  L1 w0.25: R12A.2@20.6,29.67 20.63,29.7 R11A.1@21.63,29.7
NetR11B_1: R11B.1 R12B.2 | length 1
  L1 w0.25: R12B.2@20.6,73.87 20.63,73.9 R11B.1@21.63,73.9
NetR33A_2: R33A.2 R34A.1 | length 1
  L1 w0.25: R33A.2@50.57,28.8 R34A.1@51.53,28.8
NetR33B_2: R33B.2 R34B.1 | length 1
  L1 w0.25: R33B.2@50.57,73 R34B.1@51.53,73
NetR81_1: R81.1 R83.2 T12.1 | length 2.4
  L1 w0.125: R81.1@122.846,14.294 122.846,12.804 123.026,12.624 T12.1@123.026,11.944
NetR82_1: R82.1 R86.2 T13.1 | length 2.8
  L6 w0.125: R86.2@157.064,45.556 R82.1@158.024,45.556 158.024,44.626 158.281,44.368 158.481,44.368 T13.1@158.744,44.106
NetR84_2: R84.2 T12.2 | length 1.5
  L1 w0.125: R84.2@120.846,13.294 120.846,12.804 121.066,12.583 121.066,12.003 T12.2@121.126,11.944
NetR85_2: R85.2 T13.2 | length 1.5
  L6 w0.125: T13.2@158.744,42.206 158.744,40.776 R85.2@158.764,40.756
NetR89_1: R89.1 R92.2 T14.1 | length 2.8
  L6 w0.125: R92.2@157.064,10.356 R89.1@158.024,10.356 158.024,9.426 158.281,9.168 158.481,9.168 T14.1@158.744,8.906
NetR90_1: R90.1 R94.2 T15.1 | length 3.5
  L6 w0.125: R90.1@149.494,33.486 149.494,32.656 149.244,32.406 T15.1@149.244,31.806 149.444,31.806 149.894,31.356 R94.2@150.824,31.356
NetR91_2: R91.2 T14.2 | length 1.5
  L6 w0.125: T14.2@158.744,7.006 158.744,5.576 R91.2@158.764,5.556
NetR93_2: R93.2 T15.2 | length 1.6
  L6 w0.125: T15.2@149.244,29.906 149.264,29.886 R93.2@149.264,28.356
NetR97_1: R97.1 R119.2 T16.1 | length 3.5
  L6 w0.125: R97.1@149.494,15.886 149.494,15.056 149.244,14.806 T16.1@149.244,14.206 149.444,14.206 149.894,13.756 R119.2@150.824,13.756
NetR98_1: R98.1 R121.2 T17.1 | length 2.8
  L6 w0.125: R121.2@157.064,27.956 R98.1@158.024,27.956 158.024,27.026 158.281,26.768 158.481,26.768 T17.1@158.744,26.506
NetR99_2: R99.2 T16.2 | length 1.6
  L6 w0.125: T16.2@149.244,12.306 149.264,12.286 R99.2@149.264,10.756
NetR120_2: R120.2 T17.2 | length 1.5
  L6 w0.125: T17.2@158.744,24.606 R120.2@158.744,23.176 R120.2@158.764,23.156
NetR153_1: R153.1 R154.2 | length 1
  L1 w0.125: R154.2@167.594,3.026 R153.1@167.594,3.986
NetR154_1: R154.1 T2.3 | length 1.5
  L1 w0.125: T2.3@167.394,0.706 167.394,1.356 167.594,1.556 R154.1@167.594,2.086
NetR182_1: R182.1 T1.3 | length 2.3
  L1 w0.125: R182.1@168.794,5.826 168.794,8.006 T1.3@168.844,8.056
NetR184_1: R184.1 T19.1 T20.3 | length 8.4
  L1 w0.125: T20.3@184.744,0.856 184.744,2.706 185.444,3.406 T19.1@187.044,3.406 187.044,4.006 187.294,4.256 187.594,4.256 187.894,4.556 R184.1@187.894,6.856
NetR191_2: R191.2 R192.1 T22.3 | length 3.7
  L6 w0.2: T22.3@172.894,87.206 173.944,87.206 174.294,87.556 R192.1@175.224,87.556 R191.2@175.224,86.356
NetR192_2: R192.2 T21.4 | length 3.1
  L1 w0.2: T21.4@176.689,90.456 176.694,90.451 v1(176.694,88.756)
  L6 w0.2: R192.2@176.164,87.556 176.164,88.226 v1(176.694,88.756)
NetR193_1: R193.1 T22.1 | length 1.6
  L6 w0.2: T22.1@173.844,84.906 174.344,84.906 174.764,85.326 R193.1@175.294,85.326
NetR218A_2: R218A.2 R219A.1 R221A.2 | length 4
  L1 w0.132: R218A.2@8.6,22.7 R219A.1@8.6,26.7
NetR218B_2: R218B.2 R219B.1 R221B.2 | length 4
  L1 w0.132: R218B.2@8.6,61.7 R219B.1@8.6,65.7
P2V5_REF: B4.1 C214.2 IC55.6 IC55.7 R36A.1 R36B.1 R70A.1 R70B.1 R77.1 | length 224.7
  L1 w0.58: v1(19.9,61.9) v1(20.4,61.9) R70B.1@26.53,61.9 ; v1(20.8,15.7) v1(21.3,15.7) 21.9,15.7 23.9,17.7 R70A.1@26.63,17.7 ; v1(21.5,5.1) v1(22,5.1) R36A.1@25.33,5.1 ; v1(21.5,49.3) v1(22,49.3) R36B.1@25.33,49.3 ; R77.1@75.33,55.8 75.33,56.83 75.7,57.2 78.4,57.2 80.4,59.2 B4.1@80.4,68.3 C214.2@80.4,69.9
  L6 w1.5: v1(19.9,61.9) 17.8,61.9 ; v1(20.8,15.7) 19.4,15.7 ; v1(21.5,5.1) 18.2,5.1 16.8,6.5 16.8,13.1 19.4,15.7 ; v1(21.5,49.3) 17.8,49.3 ; v1(82.1,68) 82.1,85.7 77.2,90.6 21.5,90.6 17.8,86.9 17.8,61.9 ; 17.8,49.3 17.8,61.9 ; 17.8,49.3 16.1,47.6 16.1,46.6 12.7,43.2 12.7,40.4 14.4,38.7 14.4,32.4 12.5,30.5 12.5,27.6 17,23.1 17,20.5 19.4,18.1 19.4,15.7
  other v1: 82.1,68.6
P3V3: C56.2 C57.2 C59.2 C60.2 C121.2 C125.2 C126.2 C129.2 C133.2 C134.2 C147.2 C150.2 C151.2 C152.2 C153.2 C162.2 C163.1 C298.2 IC9.4 IC11.8 IC12.8 IC13.8 IC26.6 IC40.14 L9.2 R80.2 R87.2 R88.2 R95.2 R96.2 R139.2 R140.2 | length 74.2
  L1 w0.3: v1(151.844,56.306) C57.2@152.394,56.306 ; v1(151.844,62.006) C56.2@152.394,62.006 ; IC13.8@158.194,50.451 158.194,49.656 158.244,49.606 C60.2@158.244,48.956 v1(158.244,48.406) ; IC12.8@160.894,44.851 160.794,44.751 160.794,44.056 160.944,43.906 C59.2@160.944,43.356 v1(160.944,42.806) ; L9.2@174.219,65.456 179.094,65.456 180.364,66.726 R140.2@180.364,68.556 R139.2@181.324,68.556 ; IC40.14@182.094,14.406 182.144,14.456 C298.2@182.144,15.856 v1(182.144,16.48)
  L1 w0.5: C57.2@152.394,56.306 153.276,56.306 153.381,56.201 154.044,56.201 IC11.8@154.094,56.151 ; C56.2@152.394,62.006 153.276,62.006 153.381,61.901 154.044,61.901 IC9.4@154.094,61.851
  L3 w0.3: v1(152.828,5.59) 154.69,5.59 154.9,5.8 162.038,5.8 167.294,11.056 174.994,11.056 176.394,12.456 180.494,12.456 182.144,14.106 v1(182.144,16.48)
  L6 w0.3: IC26.6@147.491,4.201 148.236,3.456 C121.2@149.03,3.456
  L6 w0.5: v1(144.544,11.006) C150.2@144.544,12.056 144.544,12.606 144.394,12.756 C151.2@144.394,13.206 144.414,13.186 R95.2@145.494,13.186 ; v1(144.544,28.606) C134.2@144.544,29.656 144.544,30.206 144.394,30.356 C147.2@144.394,30.806 144.414,30.786 R88.2@145.494,30.786 ; v1(152.394,5.156) v1(152.828,5.59) 153.478,5.59 C129.2@153.494,5.606 C133.2@154.494,5.606 155.484,5.606 155.524,5.566 R87.2@155.524,5.556 ; v1(152.394,22.756) v1(152.828,23.19) 153.478,23.19 C152.2@153.494,23.206 C153.2@154.494,23.206 155.484,23.206 155.524,23.166 R96.2@155.524,23.156 ; v1(152.394,40.356) v1(152.828,40.79) 153.478,40.79 C125.2@153.494,40.806 C126.2@154.494,40.806 155.484,40.806 155.524,40.766 R80.2@155.524,40.756
  other v1: 144.544,11.531 144.544,29.131 175.494,71.056 176.294,71.056 176.294,71.856 176.294,72.556
P3V3_DIOT: C1.2 C174.1 C180.2 D22.2 IC38.5 IC41.2 IC41.14 IC42.8 R155.2 R160.2 R165.1 R178.1 R180.1 R181.1 R184.2 R185.1 | length 11.5
  L1 w0.2: R155.2@166.294,3.956 v1(166.294,4.706) ; v1(171.744,11.756) R185.1@172.494,11.756 ; R165.1@176.194,8.456 v1(176.194,9.206) ; R178.1@177.794,8.456 v1(177.794,9.206) ; IC41.2@177.894,-1.144 v1(177.894,-0.144) ; R160.2@179.394,8.456 v1(179.394,9.206) ; R180.1@182.794,0.756 v1(182.794,1.506) ; R184.2@187.894,8.456 v1(187.894,9.206)
  L1 w0.3: v1(168.794,1.561) R181.1@168.794,2.186 ; IC42.8@173.999,-0.244 174.044,-0.289 C180.2@174.044,-1.944 v1(174.668,-1.944) ; v1(175.169,5.206) 176.344,5.206 176.894,4.656 IC41.14@177.244,4.656
  other v1: 188.794,12.556 188.794,13.256
P3V3_ISO: B2.1 C58.2 C122.2 C123.2 C124.2 C127.2 C128.2 C148.2 C149.2 C184.2 C185.2 C186.2 C187.2 C188.2 C194.2 C205.2 C215.2 IC10.6 IC10.16 IC20.18 IC27.6 IC28.6 IC29.6 IC33.6 IC34.6 IC39.35 IC47.35 IC48.35 IC49.35 IC50.35 IC53.1 IC58.35 R75.2 R76.2 R79.2 R142.2 R194.2 R195.2 R196.2 | length 34.2
  L1 w0.2: IC20.18@79.2,53.2 79.2,54 79.25,54.05 C194.2@79.25,54.8 ; v1(122.625,48.825) IC10.6@123.65,48.825
  L1 w0.254: R76.2@78.27,54.8 C194.2@79.25,54.8
  L1 w0.3: C194.2@79.25,54.8 v1(79.25,55.33) ; R75.2@81.27,47.7 v1(81.8,47.7) ; IC48.35@99.05,9.85 99.85,9.85 99.9,9.9 100.5,9.9 v1(100.5,9.37) ; IC47.35@99.45,24.25 100.25,24.25 100.3,24.3 100.9,24.3 v1(100.9,23.77) ; v1(111.17,44.47) R196.2@111.17,45 R194.2@111.17,46 R142.2@112.13,46 R195.2@112.13,45 ; IC49.35@111.35,28.25 112.15,28.25 112.2,28.3 112.8,28.3 v1(112.8,27.77) ; IC39.35@111.35,37.55 112.15,37.55 112.2,37.6 112.8,37.6 v1(112.8,37.07) ; IC50.35@111.55,2.95 112.35,2.95 112.4,3 113,3 v1(113,2.47) ; IC58.35@111.55,12.25 112.35,12.25 112.4,12.3 113,12.3 v1(113,11.77) ; v1(117.75,43.82) C58.2@117.75,44.35 IC10.16@117.75,45.575 ; v1(118.776,10.619) C123.2@118.776,11.244 C122.2@119.776,11.244 ; v1(119.151,10.164) R79.2@119.776,10.164
  L6 w0.3: v1(118.776,10.619) 119.132,10.263 119.132,10.183 v1(119.151,10.164) ; C148.2@120.494,20.006 121.287,20.006 122.032,19.261 IC33.6@122.062,19.261 ; C128.2@120.494,37.606 121.287,37.606 122.032,36.861 IC29.6@122.062,36.861 ; C127.2@127.194,11.206 127.987,11.206 128.732,10.461 IC28.6@128.762,10.461 ; C149.2@127.194,28.806 127.987,28.806 128.732,28.061 IC34.6@128.762,28.061 ; C124.2@127.194,46.406 127.987,46.406 128.732,45.661 IC27.6@128.762,45.661
  other v1: 103.9,44 104.6,44 105.3,44 106,44 105.3,44.7 106,44.7
P3V3_ISO_PG: IC53.3 R195.1 T3.1 | length 12.5
  L1 w0.1: IC53.3@104.2,47.65 104.75,47.65 104.8,47.7 v1(105.1,47.7) ; R195.1@113.07,45 v1(113.7,45)
  L6 w0.1: v1(105.1,47.7) 112.1,47.7 112.4,47.4 113.4,47.4 113.65,47.15 T3.1@113.65,46.15 113.7,46.1 v1(113.7,45)
P3V3_MP: C169.2 C219.2 C306.2 D22.1 IC37.8 IC43.4 IC44.8 J8.30 R132.2 R134.2 | length 213.7
  L1 w0.2: R134.2@184.294,10.556 v1(184.294,11.306)
  L1 w0.3: v1(183.969,16.206) C169.2@184.594,16.206 185.169,16.206 185.519,15.855 185.944,15.855 186.019,15.78 IC37.8@186.019,15.356 ; IC44.8@205.194,20.561 205.344,20.711 205.849,20.711 206.194,21.056 v1(207.518,21.056) ; IC43.4@209.794,16.706 209.844,16.656 C306.2@209.844,15.256 v1(209.844,14.631)
  L3 w0.15: v1(0.5,4.2) 2.2,4.2 4.9,1.5 4.9,-1.8 7.2,-4.1 141.8,-4.1 142.9,-3 182.938,-3 183.394,-2.544 183.394,7.356 184.294,8.256 v1(184.294,11.306)
  L6 w0.15: R132.2@-1.8,4.83 -0.13,4.83 v1(0.5,4.2)
  other v1: 193.294,15.956 193.894,15.956
P3V3_MP2: C220.2 C307.2 IC45.4 IC46.8 J9.30 | length 47.1
  L1 w0.3: IC46.8@205.194,26.161 205.344,26.311 205.849,26.311 206.194,26.656 C220.2@206.894,26.656 v1(207.518,26.656) ; IC45.4@209.794,22.406 209.844,22.356 C307.2@209.844,20.956 v1(209.844,20.331)
  L4 w0.5: J9.30@175.55,21.043 186.081,21.043 189.822,24.784 198.022,24.784 200.294,27.056 204.294,27.056 204.694,26.656 v1(207.518,26.656) 208.494,26.656 209.844,25.306 v1(209.844,20.331)
P5V0: B1.1 C4A.2 C4B.2 C5A.2 C5B.2 C8A.2 C8B.2 C9A.2 C9B.2 C11A.2 C11B.2 C12A.2 C12B.2 C13A.2 C13B.2 C14A.2 C14B.2 C15A.2 C15B.2 C16A.2 C16B.2 C17A.2 C17B.2 C18A.2 C18B.2 C24A.2 C24B.2 C25A.2 C25B.2 C45A.2 C45B.2 C45C.2 C45D.2 C45E.2 C45F.2 C45G.2 C45H.2 C62A.2 C62B.2 C62C.2 C62D.2 C62E.2 C62F.2 C62G.2 C62H.2 C76A.2 C76B.2 C76C.2 C76D.2 C76E.2 C76F.2 C76G.2 C76H.2 C89A.2 C89B.2 C103A.2 C103B.2 C115A.2 C115B.2 C177A.2 C177B.2 C189A.2 C189B.2 C190A.2 C190B.2 C193.2 C195.1 C199.1 C202.2 C217A.1 C217B.1 C218A.2 C218B.2 C221A.1 C221B.1 IC2A.8 IC2B.8 IC3A.8 IC3B.8 IC4A.8 IC4B.8 IC5A.8 IC5B.8 IC7A.8 IC7B.8 IC8A.1 IC8A.14 IC8B.1 IC8B.14 IC14A.8 IC14B.8 IC15A.13 IC15B.13 IC15C.13 IC15D.13 IC15E.13 IC15F.13 IC15G.13 IC15H.13 IC16A.13 IC16B.13 IC16C.13 IC16D.13 IC16E.13 IC16F.13 IC16G.13 IC16H.13 IC17A.13 IC17B.13 IC17C.13 IC17D.13 IC17E.13 IC17F.13 IC17G.13 IC17H.13 IC20.2 IC21A.13 IC21B.13 IC22A.13 IC22B.13 IC23A.13 IC23B.13 IC24A.13 IC24B.13 IC51A.8 IC51B.8 L3.2 L5A.2 L5B.2 R14A.2 R14B.2 R46A.2 R46B.2 R49A.2 R49B.2 R50A.2 R50B.2 R54A.2 R54B.2 R59A.2 R59B.2 R214A.2 R214B.2 | length 110.6
  L1 w0.2: R59A.2@23.8,26.07 23.82,26.07 24.01,26.26 24.01,26.28 24.33,26.6 25.9,26.6 26.096,26.404 26.096,26.104 v1(26.1,26.1) ; R14A.2@23.8,33.97 23.82,33.97 24.01,34.16 24.01,34.18 24.43,34.6 25.983,34.6 26.1,34.483 v1(26.1,34) ; R59B.2@23.8,70.27 23.82,70.27 24.01,70.46 24.01,70.48 24.33,70.8 25.9,70.8 26.096,70.604 26.096,70.304 v1(26.1,70.3) ; R14B.2@23.8,78.17 23.82,78.17 24.01,78.36 24.01,78.38 24.43,78.8 25.983,78.8 26.1,78.683 v1(26.1,78.2) ; R49A.2@33,32.87 33.02,32.87 33.21,33.06 33.21,33.08 33.63,33.5 35.183,33.5 35.3,33.383 v1(35.3,32.9) ; R49B.2@33,77.07 33.02,77.07 33.21,77.26 33.21,77.28 33.63,77.7 35.183,77.7 35.3,77.583 v1(35.3,77.1) ; R46A.2@45.2,32.17 45.22,32.17 45.41,32.36 45.41,32.38 45.83,32.8 47.383,32.8 47.5,32.683 v1(47.5,32.2) ; R46B.2@45.2,76.37 45.22,76.37 45.41,76.56 45.41,76.58 45.83,77 47.383,77 47.5,76.883 v1(47.5,76.4) ; R50A.2@55.7,32.47 55.72,32.47 55.91,32.66 55.91,32.68 56.33,33.1 57.883,33.1 58,32.983 v1(58,32.5) ; R50B.2@55.7,76.67 55.72,76.67 55.91,76.86 55.91,76.88 56.33,77.3 57.883,77.3 58,77.183 v1(58,76.7) ; R54A.2@66.87,21.9 66.87,21.88 67.06,21.69 67.08,21.69 67.5,21.27 67.5,19.717 67.383,19.6 v1(66.9,19.6) ; R54B.2@66.87,66.1 66.87,66.08 67.06,65.89 67.08,65.89 67.5,65.47 67.5,63.917 67.383,63.8 v1(66.9,63.8)
  L1 w0.25: v1(100.325,45.1) 100.325,43.262 B1.1@100.362,43.225
  L1 w0.3: L5A.2@18.1,11.65 19.62,11.65 20.14,12.17 20.14,12.19 20.28,12.33 R214A.2@20.3,12.33 ; L5B.2@18.1,50.65 19.62,50.65 20.14,51.17 20.14,51.19 20.28,51.33 R214B.2@20.3,51.33 ; IC17C.13@29.825,36.55 29.825,35.025 C76C.2@29.85,35 v1(29.85,34.47) ; IC17G.13@29.825,80.75 29.825,79.225 C76G.2@29.85,79.2 v1(29.85,78.67) ; v1(32.85,24.63) C45B.2@32.85,24.1 32.875,24.075 IC15B.13@32.875,22.55 ; v1(32.85,68.83) C45F.2@32.85,68.3 32.875,68.275 IC15F.13@32.875,66.75 ; IC16C.13@35.425,36.55 35.425,35.025 C62C.2@35.45,35 v1(35.45,34.47) ; IC16G.13@35.425,80.75 35.425,79.225 C62G.2@35.45,79.2 v1(35.45,78.67) ; v1(38.45,24.63) C62B.2@38.45,24.1 38.475,24.075 IC16B.13@38.475,22.55 ; v1(38.45,68.83) C62F.2@38.45,68.3 38.475,68.275 IC16F.13@38.475,66.75 ; IC15C.13@41.025,36.55 41.025,35.025 C45C.2@41.05,35 v1(41.05,34.47) ; IC15G.13@41.025,80.75 41.025,79.225 C45G.2@41.05,79.2 v1(41.05,78.67) ; IC17A.13@41.925,7.05 41.925,5.525 C76A.2@41.95,5.5 v1(41.95,4.97) ; IC17E.13@41.925,51.25 41.925,49.725 C76E.2@41.95,49.7 v1(41.95,49.17) ; v1(44.05,24.63) C76B.2@44.05,24.1 44.075,24.075 IC17B.13@44.075,22.55 ; v1(44.05,68.83) C76F.2@44.05,68.3 44.075,68.275 IC17F.13@44.075,66.75 ; v1(46.05,44.53) C45D.2@46.05,44 46.075,43.975 IC15D.13@46.075,42.45 ; v1(46.05,88.73) C45H.2@46.05,88.2 46.075,88.175 IC15H.13@46.075,86.65 ; IC16A.13@47.525,7.05 47.525,5.525 C62A.2@47.55,5.5 v1(47.55,4.97) ; IC16E.13@47.525,51.25 47.525,49.725 C62E.2@47.55,49.7 v1(47.55,49.17) ; v1(51.65,44.53) C62D.2@51.65,44 51.675,43.975 IC16D.13@51.675,42.45 ; v1(51.65,88.73) C62H.2@51.65,88.2 51.675,88.175 IC16H.13@51.675,86.65 ; IC15A.13@53.125,7.05 53.125,5.525 C45A.2@53.15,5.5 v1(53.15,4.97) ; IC15E.13@53.125,51.25 53.125,49.725 C45E.2@53.15,49.7 v1(53.15,49.17) ; v1(57.25,44.53) C76D.2@57.25,44 57.275,43.975 IC17D.13@57.275,42.45 ; v1(57.25,88.73) C76H.2@57.25,88.2 57.275,88.175 IC17H.13@57.275,86.65 ; v1(68.07,16.45) C103A.2@68.6,16.45 68.625,16.475 IC22A.13@70.15,16.475 ; v1(68.07,22.05) C115A.2@68.6,22.05 68.625,22.075 IC23A.13@70.15,22.075 ; v1(68.07,27.65) C177A.2@68.6,27.65 68.625,27.675 IC24A.13@70.15,27.675 ; v1(68.07,33.25) C89A.2@68.6,33.25 68.625,33.275 IC21A.13@70.15,33.275 ; v1(68.07,60.65) C103B.2@68.6,60.65 68.625,60.675 IC22B.13@70.15,60.675 ; v1(68.07,66.25) C115B.2@68.6,66.25 68.625,66.275 IC23B.13@70.15,66.275 ; v1(68.07,71.85) C177B.2@68.6,71.85 68.625,71.875 IC24B.13@70.15,71.875 ; v1(68.07,77.45) C89B.2@68.6,77.45 68.625,77.475 IC21B.13@70.15,77.475
  other v1: 69.1,8.3 69.7,8.3 70.3,8.3 30.7,9 31,9.6 69.6,12.7 69.6,13.4 65.9,19.6 66.4,19.6 26.1,25.1 26.1,25.6 47.5,31.2 58,31.5 47.5,31.7 35.3,31.9 58,32 35.3,32.4 26.1,33 26.1,33.5 98.925,45.1 99.625,45.1 98.925,45.8 76.1,46.3 76.7,46.3 77.3,46.3 69.1,52.5 69.7,52.5 70.3,52.5 30.7,53.2 31,53.8 69.6,56.9 69.6,57.6 65.9,63.8 66.4,63.8 26.1,69.3 26.1,69.8 47.5,75.4 58,75.7 47.5,75.9 35.3,76.1 58,76.2 35.3,76.6 26.1,77.2 26.1,77.7
  other v3: 13.5,7.9 14.4,7.9 13.5,8.7 14.4,8.7 13.5,9.5 14.4,9.5 13.5,46.9 14.4,46.9 13.5,47.7 14.4,47.7 13.5,48.5 14.4,48.5
P5V0_ILIM: IC52.6 R200.2 | length 1.6
  L1 w0.2: R200.2@87.5,52.14 88.06,52.14 88.467,51.733 88.842,51.733 IC52.6@88.875,51.7
P5V0_PG: IC52.5 IC54.4 IC55.1 R196.1 T4.1 | length 76.7
  L1 w0.125: IC54.4@85.2,88.325 86.2,88.325 86.25,88.275 v1(86.6,88.275) ; IC55.1@86.9,69.725 v1(86.9,69.2) 82.1,64.4 82.1,56.6 85.813,52.888 v1(89.525,52.888) IC52.5@89.525,51.7 ; v1(110,49.4) 110,47.7 109.5,47.2 109.5,45.2 109.7,45 R196.1@110.23,45
  L6 w0.125: v1(86.6,88.275) 86.6,83.3 85.6,82.3 85.6,78.7 86.9,77.4 v1(86.9,69.2) ; v1(89.525,52.888) 91.613,50.8 105,50.8 105.9,51.7 109.3,51.7 109.6,51.4 110.4,51.4 110.75,51.05 T4.1@110.75,50.35 110.55,50.35 110,49.8 v1(110,49.4)
P5V0_PGFB: IC52.7 R197.1 R201.2 | length 2.3
  L1 w0.2: R197.1@87.5,46.37 R201.2@87.5,47.33 87.53,47.3 IC52.7@88.875,47.3
P5V0_SET: C203.2 IC52.8 R198.2 R199.2 | length 3.7
  L1 w0.2: R198.2@89.23,43.7 R199.2@89.23,44.7 89.23,45.68 C203.2@89.25,45.7 89.293,45.743 89.293,46.193 89.517,46.417 89.517,47.292 IC52.8@89.525,47.3
P6V0: B12.1 C73.1 C74.1 C146.2 C196.2 C197.2 C198.2 C204.2 C213.2 D2.1 D3.1 IC52.1 IC52.2 IC52.3 IC52.4 IC53.4 IC53.6 IC55.2 R114.2 R126.2 | length 32.2
  L1 w0.2: IC53.6@102.1,46.35 101.65,46.35 101.5,46.5 101.5,47.5 101.65,47.65 IC53.4@102.1,47.65
  L6 w0.3: v1(98.262,52.425) 101.925,52.425 103,53.5 116.3,53.5 119.2,56.4 R126.2@120.6,56.4 C146.2@122.2,56.4 122.2,57.1 122.5,57.4 R114.2@125.7,57.4
P12V0_DIOT: C173.2 IC38.1 IC38.3 J6.A1 J6.D1 J6.E1 J6.G1 J6.H1 J6.J1 J6.K1 R257.1 R260.1 R261.1 R262.1 | length 8.4
  L1 w0.2: IC38.1@191.344,8.356 191.344,9.406 191.694,9.756 192.894,9.756 193.244,9.406 IC38.3@193.244,8.356
  L1 w0.6: IC38.1@191.344,8.356 191.344,6.706 C173.2@191.294,6.656 191.294,5.907 191.645,5.556 v1(192.194,5.556) v1(192.794,5.556)
P12V0_EEM: C164.2 C165.2 C170.2 C171.2 D21.1 FL1.2 IC36.1 J8.28 J8.29 J9.28 J9.29 R128.1 R141.2 R191.1 R257.2 R260.2 R261.2 R262.2 T21.1 T21.2 T21.3 | length 211.4
  L1 w0.2: v1(179.694,75.956) R128.1@180.344,75.956
  L3 w0.15: v1(1.3,3.5) 1.6,3.5 3.7,1.4 3.7,-1.7 6.7,-4.7 144.138,-4.7 144.494,-4.344 185.894,-4.344 189.094,-1.144 189.094,5.056 v1(189.794,5.756)
  L6 w0.15: R141.2@-2.8,4.83 -2.8,4.1 -2.2,3.5 v1(1.3,3.5)
  L6 w0.2: R191.1@176.164,86.356 176.894,86.356 178.194,87.656 v1(178.194,89.056)
  other v1: 183.694,79.256 181.494,80.456 182.194,80.456 182.894,80.456 182.094,88.956 182.694,88.956 183.294,88.956 183.894,88.956
P12V0_LLC: C130.1 C131.1 C168.2 L10.4 R101.2 T7.7 T7.8
  other v1: 161.294,83.256 161.994,83.256 162.694,83.256 161.294,83.956 161.994,83.956 162.694,83.956 130.794,85.756 131.294,86.256 130.794,86.756 131.294,87.256 130.794,87.756 131.294,88.256
PE_CLK.CLK_N: J6.F4
PE_CLK.CLK_P: J6.E4
PGOOD: IC36.7 R140.1 R155.1 T2.1 T18.1 | length 96.2
  L1 w0.125: R155.1@166.294,2.356 v1(166.294,1.156) 166.294,-0.044 166.444,-0.194 T2.1@166.444,-1.594
  L1 w0.2: v1(176.944,80.406) IC36.7@177.494,80.406 ; v1(178.544,72.706) T18.1@178.544,72.006 178.544,71.406 179.424,70.526 R140.1@179.424,68.556
  L6 w0.2: v1(166.294,1.156) 167.194,1.156 169.694,3.656 169.694,5.056 167.794,6.956 167.794,58.956 177.794,68.956 177.794,70.756 178.544,71.506 v1(178.544,72.706) 178.544,74.756 177.744,75.556 177.744,78.906 176.944,79.706 v1(176.944,80.406)
PHASE_DET_OUTA: IC59A.3 R57A.1 R58A.2 R213A.2 R225A.2 | length 32.2
  L1 w0.3: R225A.2@11.57,43.6 16.8,43.6 17.8,42.6 17.8,35.8 17.2,35.2 ; IC59A.3@15.38,35.2 17.2,35.2 ; R58A.2@20.6,21.77 20.6,22.2 20.03,22.77 19.48,22.77 19.34,22.91 19.34,22.93 17.8,24.47 17.8,34.6 17.2,35.2 ; R58A.2@20.68,21.77 R57A.1@21.6,21.77
PHASE_DET_OUTB: IC59B.3 R57B.1 R58B.2 R213B.2 R225B.2 | length 28
  L1 w0.3: R225B.2@11.57,82.6 16.8,82.6 17.8,81.6 17.8,74.8 17.2,74.2 ; IC59B.3@15.38,74.2 17.2,74.2 ; R57B.1@21.63,66 21.6,65.97 R213B.2@19.5,65.97 18.53,65.97 17.8,66.7 17.8,73.6 17.2,74.2
PID_IN_OFFSETA: C34A.2 R48A.1 R71A.2 R72A.2 | length 13.2
  L1 w0.2: R71A.2@28.47,16.7 29.47,16.7 R72A.2@29.5,16.67
  L1 w0.25: R72A.2@29.5,16.67 29.5,22.4 30,22.9 30,24.3 30.7,25 30.7,26 31,26.3 C34A.2@31.85,26.3 31.85,27.28 R48A.1@31.8,27.33
PID_IN_OFFSETB: C34B.2 R48B.1 R71B.2 R72B.2 | length 13.2
  L1 w0.2: R71B.2@28.47,60.9 29.47,60.9 R72B.2@29.5,60.87
  L1 w0.25: R72B.2@29.5,60.87 29.5,66.6 30,67.1 30,68.5 30.7,69.2 30.7,70.2 31,70.5 C34B.2@31.85,70.5 31.85,71.48 R48B.1@31.8,71.53
PID_OUTA: J11.1 R224A.2 | length 5.3
  L1 w0.25: J11.1@0.4,12.3 R224A.2@5.7,12.3
PID_OUTB: J4.1 R224B.2 | length 5.3
  L1 w0.25: J4.1@0.4,51.3 R224B.2@5.7,51.3